# Altium PCB BBBExtend.PcbDoc
Units mil, origin at the board's own origin, x right, y up, seen from the top; angles counter-clockwise.
Board outline 3205 x 2770 mil, 2 copper layers (Top Layer, Bottom Layer); 5 components, 10 nets, 218 pads, 4 vias.
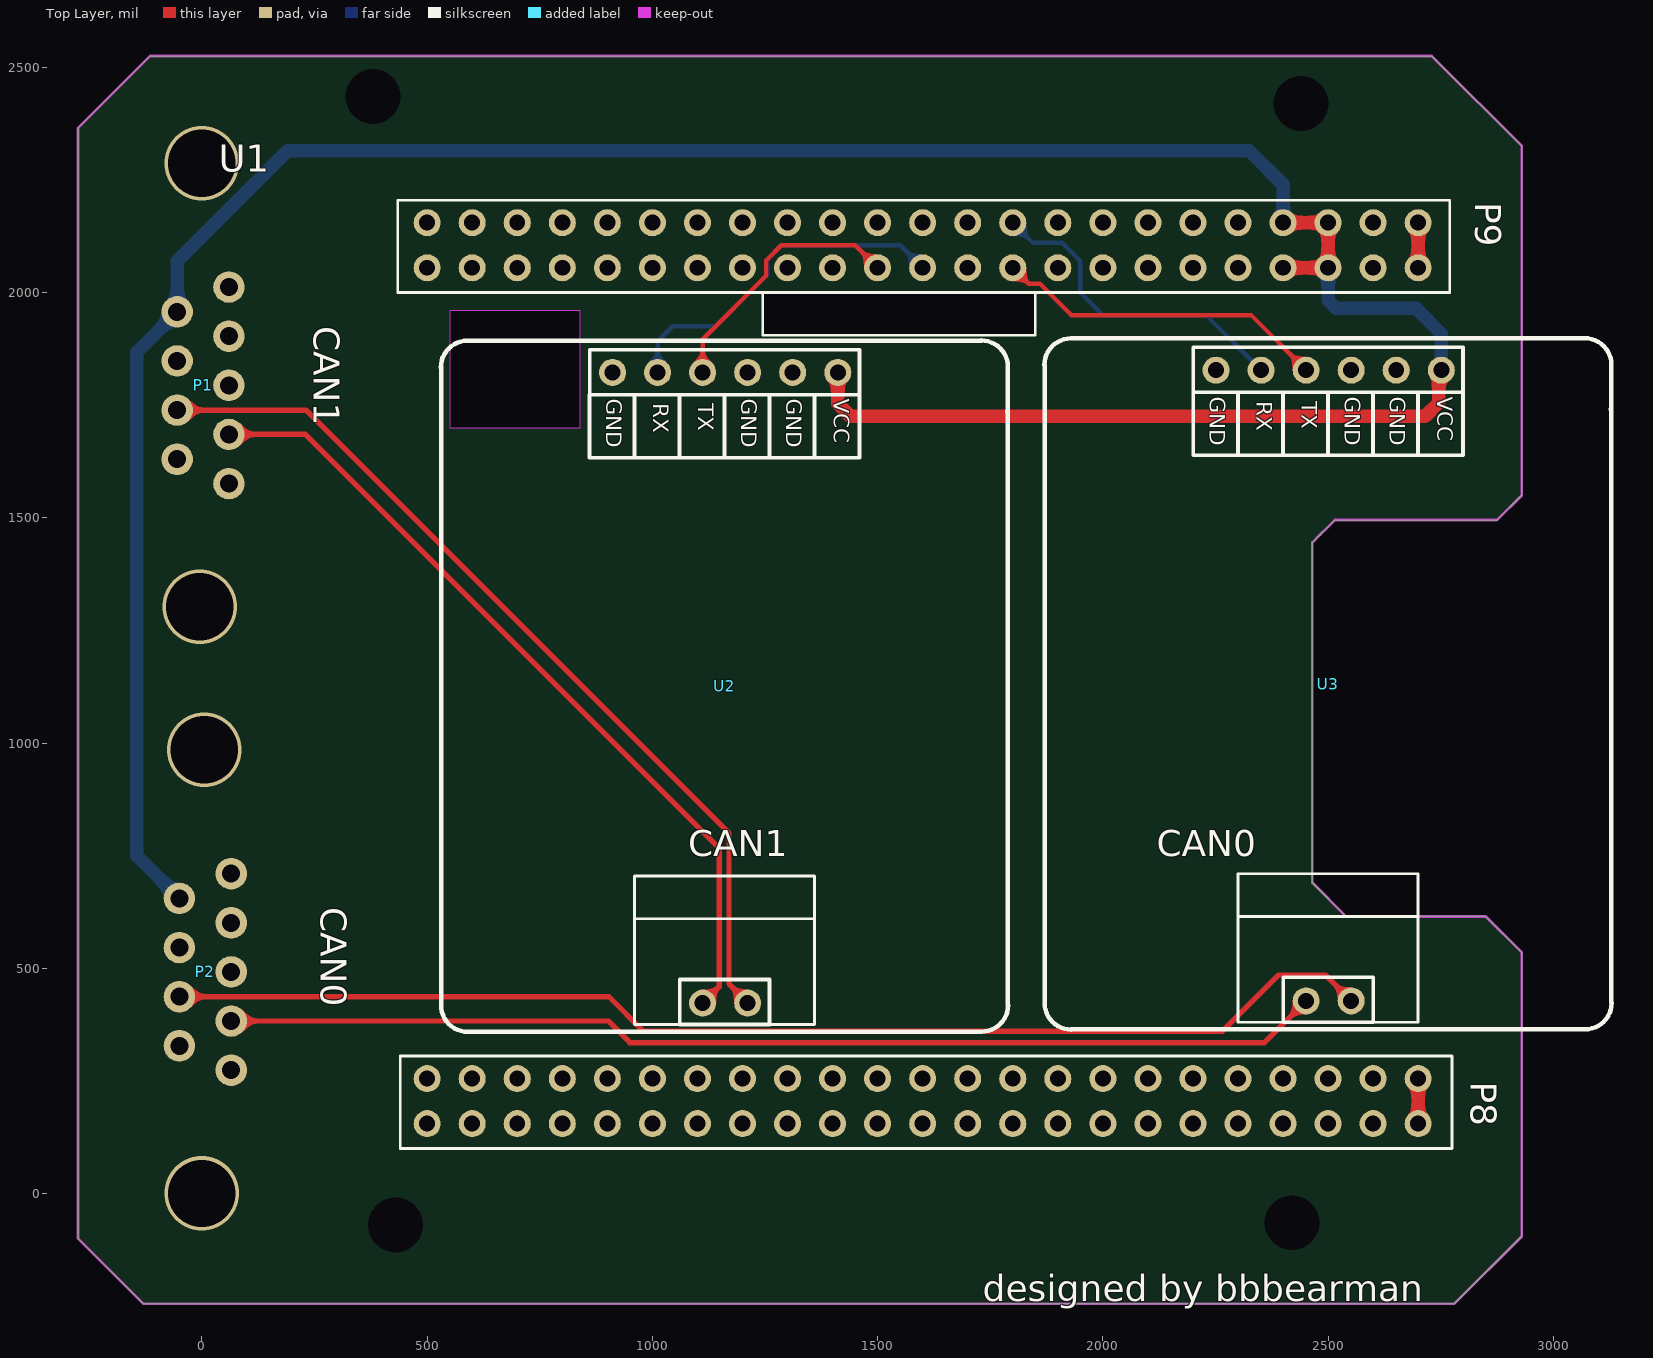
[diagram p0: Top Layer view]
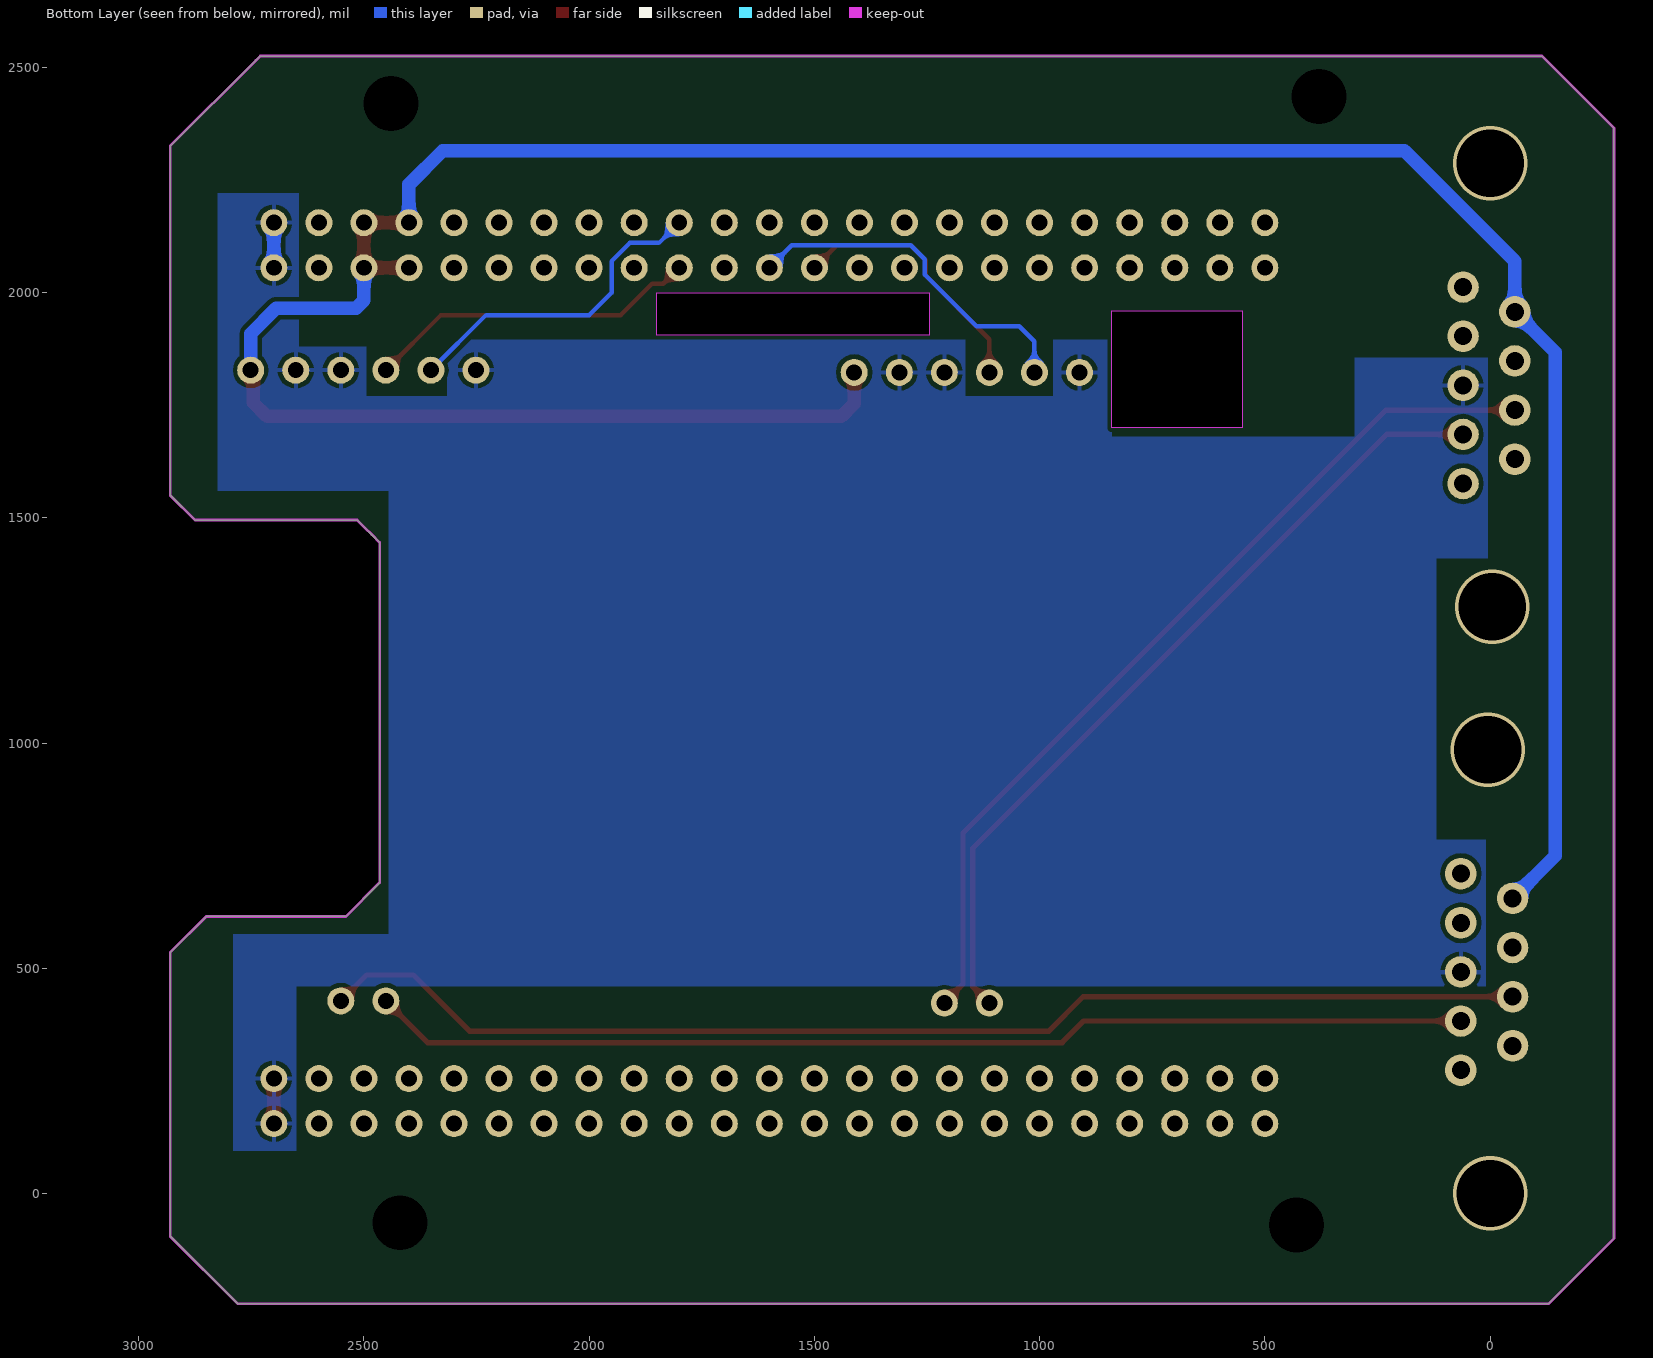
[diagram p1: Bottom Layer view, seen from below]
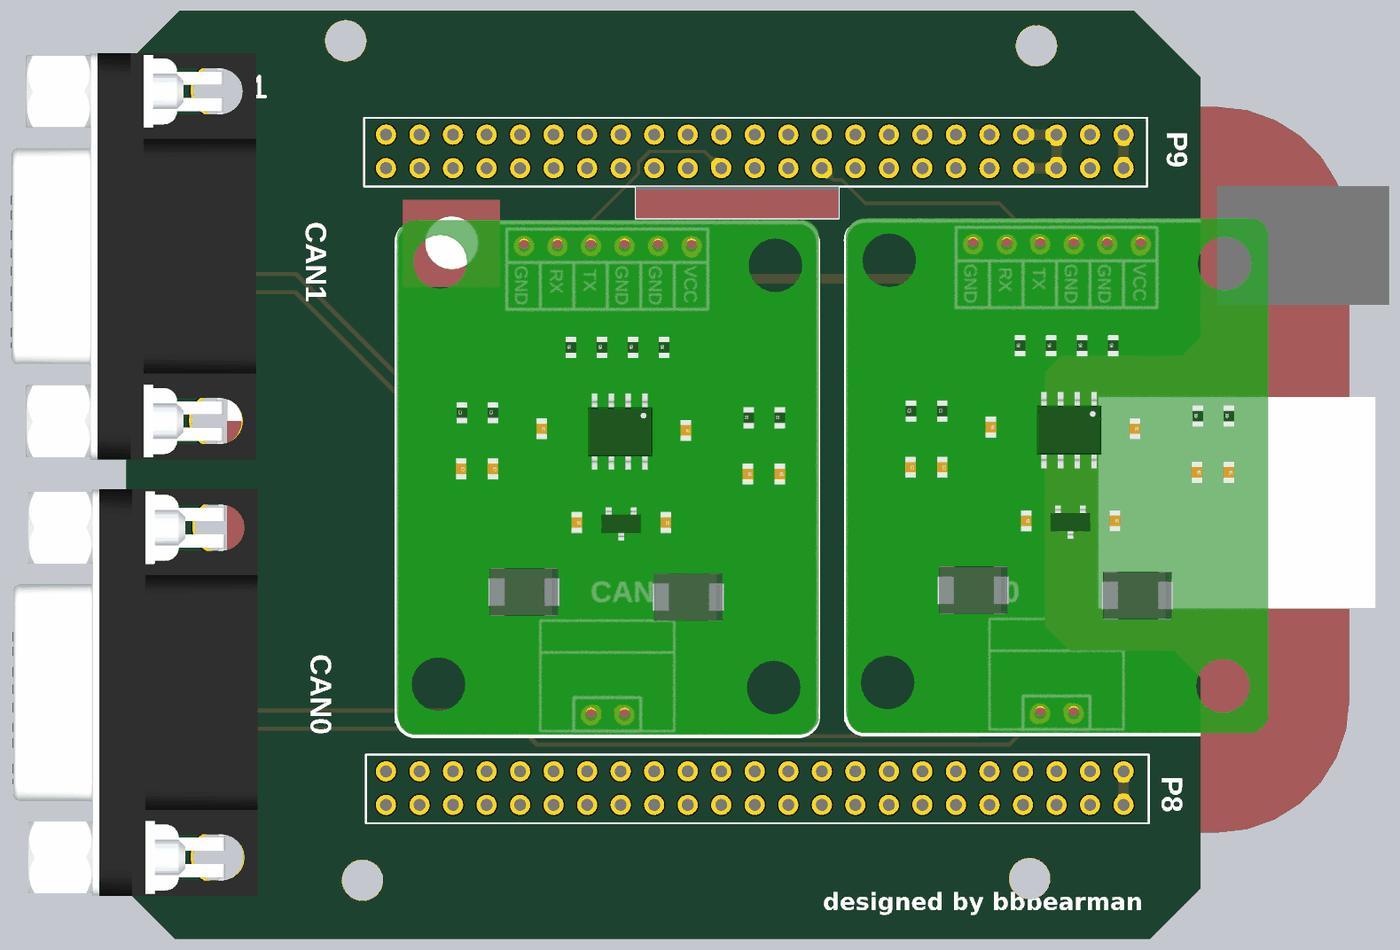
[diagram p2: 3D render of the assembled board from above, using the file's embedded part models]

## Layer stack, top to bottom
Top Solder: solder mask 0.4, Solder Resist, Dk 3.5
Top Layer: signal copper 1.4
Dielectric 1: dielectric 12.6, FR-4, Dk 4.8
Bottom Layer: signal copper 1.4
Bottom Solder: solder mask 0.4, Solder Resist, Dk 3.5

## Board outline
-275,-100 -130,-245 2780,-245 2930,-95 2930,535 2850,615 2540,615 2465,690 2465,1445 2482.5,1462.5 2497.5,1477.5 2515,1495 2875,1495 2930,1550 2930,2325 2740,2515 2730,2525 -115,2525 -275,2365
cut-out: 550,1700 840,1700 840,1960 550,1960
cut-out: 1245,1905 1850,1905 1850,2000 1245,2000

## Design rules (kind name [scope] priority, off if disabled: settings)
Clearance [All] p1: gap=10 ignorepadtopadclearanceinfootprint=FALSE except(0: Arc-Hole Track-Hole SMDPad-Hole THPad-Hole Via-Hole Fill-Hole Poly-Hole Region-Hole Text-Hole)
PolygonConnect [All] p1: connectstyle=Relief reliefconductorwidth=10 reliefentries=4 polygonreliefangle="90 Angle" airgapwidth=10
RoutingVias [All] p1: holewidth=28 width=50 viastyle="Through Hole" minholewidth=28 minwidth=50 maxholewidth=28 maxwidth=50
SolderMaskExpansion [All] p1: expansion=4 istentingtop=FALSE
Width [All] p1: maxlimit=100 minlimit=10 preferedwidth=10
30 further rules are at their usual default settings.

## Components (designator, comment, footprint, x,y, rotation, side; value= is the part's Value field where it differs from the comment)
P1 "DB9" DB9 60,2012.17 r270 top
P2 "DB9" DB9 65,710 r270 top
U1 "BeagleBone" BeagleBoneB 2700,255 r0 top
U2 "CAN" CANTRer 911.54,1822.58 r270 top
U3 "CAN" CANTRer 2251.3,1827.58 r270 top

## Footprints (in the part's own frame and the unit in brackets; to place one, negate y for a bottom-side part, rotate by r counter-clockwise, add the part's x,y. Pads: shape width x height; smd on the part's side, far side on the other; paste and mask are expansions set on the pad)
BeagleBoneB [mil]
  round 60 hole 35.43: 1(0,0) 2(0,-100) 3(-100,0) 4(-100,-100) 5(-200,0) 6(-200,-100) 7(-300,0) 8(-300,-100) 9(-400,0) 10(-400,-100) 11(-500,0) 12(-500,-100) 13(-600,0) 14(-600,-100) 15(-700,0) 16(-700,-100) 17(-800,0) 18(-800,-100) 19(-900,0) 20(-900,-100) 21(-1000,0) 22(-1000,-100) 23(-1100,0) 24(-1100,-100) 25(-1200,0) 26(-1200,-100) 27(-1300,0) 28(-1300,-100) 29(-1400,0) 30(-1400,-100) 31(-1500,0) 32(-1500,-100) 33(-1600,0) 34(-1600,-100) 35(-1700,0) 36(-1700,-100) 37(-1800,0) 38(-1800,-100) 39(-1900,0) 40(-1900,-100) 41(-2000,0) 42(-2000,-100) 43(-2100,0) 44(-2100,-100) 45(-2200,0) 46(-2200,-100) 101(0,1900) 102(0,1800) 103(-100,1900) 104(-100,1800) 105(-200,1900) 106(-200,1800) 107(-300,1900) 108(-300,1800) 109(-400,1900) 110(-400,1800) 111(-500,1900) 112(-500,1800) 113(-600,1900) 114(-600,1800) 115(-700,1900) 116(-700,1800) 117(-800,1900) 118(-800,1800) 119(-900,1900) 120(-900,1800) 121(-1000,1900) 122(-1000,1800) 123(-1100,1900) 124(-1100,1800) 125(-1200,1900) 126(-1200,1800) 127(-1300,1900) 128(-1300,1800) 129(-1400,1900) 130(-1400,1800) 131(-1500,1900) 132(-1500,1800) 133(-1600,1900) 134(-1600,1800) 135(-1700,1900) 136(-1700,1800) 137(-1800,1900) 138(-1800,1800) 139(-1900,1900) 140(-1900,1800) 141(-2000,1900) 142(-2000,1800) 143(-2100,1900) 144(-2100,1800) 145(-2200,1900) 146(-2200,1800)
  silkscreen extent -2265,-155 75,1950, body extent -2673,-183 791,1983, height 177
CANTRer [mil]
  round 9.99 on Top Overlay: 1(-70.43,819.26) 1(-70.43,834.24) 1(-70.43,-322.1) 1(-70.43,-322.1) 1(1404.2,877.76) 1(1404.2,878.3) 1(1404.75,-380.6) 1(1419.73,-380.6) 1(1463.19,818.77) 1(1463.19,819.26) 1(1463.19,-322.16) 1(1463.73,-321.61)
  round 7.86 on Top Overlay: 1(-50.77,548.22) 1(-50.77,548.22) 1(-50.77,-51.07) 1(-50.77,-51.07) 1(49.11,548.22) 1(49.11,548.22) 1(49.11,-51.07) 1(49.11,-51.07) 1(1347.58,148.7) 1(1347.58,148.7) 1(1347.58,348.46) 1(1347.58,348.46) 1(1447.46,148.7) 1(1447.46,148.7) 1(1447.46,348.46) 1(1447.46,348.46)
  round 60 hole 35.43: 1(0,500) 2(0,400) 3(0,300) 4(0,200) 5(0,100) 6(0,0) 7(1400,300) 8(1400,200)
  round 7.99 on Top Overlay: 1(49.11,548.22) 1(49.11,448.34) 1(49.11,348.46) 1(49.11,248.58) 1(49.11,148.7) 1(49.11,48.82) 1(49.11,-51.07) 1(188.95,548.22) 1(188.95,548.22) 1(188.95,448.34) 1(188.95,248.58) 1(188.95,348.46) 1(188.95,148.7) 1(188.95,-51.07) 1(188.95,-51.07) 1(188.95,48.82)
  silkscreen extent -73,-384 1464,880, body extent -78,-380 1457,880, height 376
DB9 [mil]
  round 70 hole 40: 1(436.22,0) 2(327.17,0) 3(218.11,0) 4(109.06,0) 5(0,0) 6(382.17,-115) 7(273.11,-115) 8(164.06,-115) 9(55,-115)
  body extent -386,-678 826,52, height 530

## Free pads (board coordinates)
  round 118.11 hole 122.05: HOLE(380,2435) HOLE(430,-70) HOLE(2420,-65) HOLE(2440,2420)

## Via types
v1: diameter 165.35, hole 149.61, Top Layer to Bottom Layer, 4 vias

## Nets (pads, with @x,y where several pads share a name; then routed paths per layer and width w, separated by ;. In a path a pad name is that pad's centre, name@x,y a point inside that pad or via, vN(x,y) a via of type N, cw(c..) or ccw(c..) an arc to the next point about the centre after c; other vN are vias at no path point)
+5: P1.9 P2.9 U1.105 U1.106 U1.107 U1.108 U2.1@1411.54,1822.58 U3.1@2751.3,1827.58 | length 6401.6
  Top Layer w30: U2.1@1411.54,1822.58 1411.54,1753.46 1440,1725 2715,1725 2745.56,1755.56 2745.56,1821.84 U3.1@2751.3,1827.58 ; U1.108 U1.106 U1.105 U1.107
  Bottom Layer w30: P2.9 -145,750 -145,1867.17 P1.9 -55,2070 190,2315 2325,2315 2400,2240 U1.107 ; U1.106 2500,1982.57 2517.57,1965 2695,1965 2751.3,1908.7 U3.1@2751.3,1827.58
CAN0H: P2.7 U3.7 | length 2708.7
  Top Layer w12: P2.7 903.11,436.89 980,360 2265,360 2390,485 2493.88,485 U3.7
CAN0L: P2.2 U3.8 | length 2444.5
  Top Layer w12: P2.2 902.17,382.83 950,335 2358.73,335 U3.8
CAN0RX: U1.119 U3.5 | length 727.9
  Bottom Layer w10: U1.119 1845,2110 1910,2110 1950,2070 1950,2000 2000,1950 2228.88,1950 U3.5
CAN0TX: U1.120 U3.4 | length 745.5
  Top Layer w10: U1.120 1835,2020 1860,2020 1930,1950 2328.88,1950 U3.4
CAN1H: P1.7 U2.7 | length 2008.6
  Top Layer w12: P1.7 230.94,1739.06 1170,800 1170,465 1211.54,423.46 U2.7
CAN1L: P1.2 U2.8 | length 1827.8
  Top Layer w12: P1.2 230,1685 1148,767 1148,459.04 U2.8
CAN1RX: U1.124 U2.5 | length 786.3
  Bottom Layer w10: U2.5 1011.54,1891.54 1045,1925 1140,1925 1255,2040 1255,2073.64 1286.36,2105 1550,2105 U1.124
CAN1TX: U1.126 U2.4 | length 589.2
  Top Layer w10: U2.4 1111.54,1896.54 1253.18,2038.18 1253.18,2071.82 1286.36,2105 1450,2105 U1.126
GND: P1.3 P2.3 U1.1 U1.2 U1.101 U1.102 U2.2 U2.3 U2.6 U3.2 U3.3 U3.6 | length 300
  Top Layer w30: U1.2 U1.1 ; U1.102 U1.101
  Bottom Layer w30: U1.102 U1.101
pads on no net: P1.1 P1.4 P1.5 P1.6 P1.8 P2.1 P2.4 P2.5 P2.6 P2.8 U1.3 U1.4 U1.5 U1.6 U1.7 U1.8 U1.9 U1.10 U1.11 U1.12 U1.13 U1.14 U1.15 U1.16 U1.17 U1.18 U1.19 U1.20 U1.21 U1.22 U1.23 U1.24 U1.25 U1.26 U1.27 U1.28 U1.29 U1.30 U1.31 U1.32 U1.33 U1.34 U1.35 U1.36 U1.37 U1.38 U1.39 U1.40 U1.41 U1.42 U1.43 U1.44 U1.45 U1.46 U1.103 U1.104 U1.109 U1.110 U1.111 U1.112 U1.113 U1.114 U1.115 U1.116 U1.117 U1.118 U1.121 U1.122 U1.123 U1.125 U1.127 U1.128 U1.129 U1.130 U1.131 U1.132 U1.133 U1.134 U1.135 U1.136 U1.137 U1.138 U1.139 U1.140 U1.141 U1.142 U1.143 U1.144 U1.145 U1.146 U2.1@530.94,402.85 U2.1@530.94,417.83 U2.1@589.38,359.39 U2.1@589.44,1893.01 U2.1@589.93,358.84 U2.1@860.47,1633.63 U2.1@860.47,1773.46 U2.1@860.47,1873.35 U2.1@960.35,1633.63 U2.1@960.35,1773.46 U2.1@1060.24,375.12 U2.1@1060.24,475 U2.1@1060.24,1633.63 U2.1@1060.24,1773.46 U2.1@1160.12,1633.63 U2.1@1160.12,1773.46 U2.1@1260,375.12 U2.1@1260,475 U2.1@1260,1633.63 U2.1@1260,1773.46 U2.1@1359.88,1633.63 U2.1@1359.88,1773.46 U2.1@1459.76,1633.63 U2.1@1459.76,1773.46 U2.1@1459.76,1873.35 U2.1@1730.8,359.39 U2.1@1730.8,1893.01 U2.1@1730.31,359.39 U2.1@1745.78,1893.01 U2.1@1789.3,418.37 U2.1@1789.84,418.37 U3.1@1870.7,407.85 U3.1@1870.7,422.83 U3.1@1929.2,1898.01 U3.1@1929.14,364.39 U3.1@1929.69,363.84 U3.1@2200.24,1638.63 U3.1@2200.24,1778.46 U3.1@2200.24,1878.35 U3.1@2300.12,1638.63 U3.1@2300.12,1778.46 U3.1@2400,380.12 U3.1@2400,480 U3.1@2400,1638.63 U3.1@2400,1778.46 U3.1@2499.88,1638.63 U3.1@2499.88,1778.46 U3.1@2599.76,380.12 U3.1@2599.76,480 U3.1@2599.76,1638.63 U3.1@2599.76,1778.46 U3.1@2699.65,1638.63 U3.1@2699.65,1778.46 U3.1@2799.53,1638.63 U3.1@2799.53,1778.46 U3.1@2799.53,1878.35 U3.1@3070.07,364.39 U3.1@3070.56,364.39 U3.1@3070.56,1898.01 U3.1@3085.54,1898.01 U3.1@3129.06,423.37 U3.1@3129.6,423.37
copper on no net:
  other v1: 0,0 5,985 -5,1302.17 0,2287.17

## Polygon pours and split planes (outlines as drawn)
GND on Bottom Layer "GND_L02_P000" (solid, pour order 0): 2645,2205 2645,1880 2495,1880 2495,1770 2315,1770 2315,1895 1165,1895 1165,1770 970,1770 970,1895 840,1895 840,1680 300,1680 300,1855 5,1855 5,1410 120,1410 120,785 10,785 10,460 2650,460 2650,95 2790,95 2790,575 2445,575 2445,1560 2825,1560 2825,2220 2645,2220

## Keep-outs
Keep-Out Layer:
  lines w6: -275,-100 -130,-245 2780,-245 2930,-95 2930,535 2850,615 2540,615 2465,690 2465,1445 2482.5,1462.5 2497.5,1477.5 2515,1495 2875,1495 2930,1550 2930,1565 2930,2325 2740,2515 2730,2525 -115,2525 -275,2365 -275,-100

## Silkscreen, mask and mechanical layers (free items; w line width, h text height)
Top Overlay:
  text "CAN1" at 228.41,1924.98 h100 r270
  text "CAN1" at 1080.02,728.41 h100
  text "CAN0" at 2120.02,728.41 h100
  text "CAN0" at 243.41,634.98 h100 r270
  text "designed by bbbearman" at 1733.53,-259.39 h100

## Text inside footprints (layer, text, board x,y; h text height)
U1: Top Overlay "P9" at 2806.88,2200.59 h100 r270; Top Overlay "P8" at 2797.22,248.38 h100 r270
U2: Top Overlay "GND" at 1185.22,1763.98 h59.93 r270; Top Overlay "VCC" at 1389.98,1763.98 h59.93 r270; Top Overlay "RX" at 989.82,1753.99 h59.93 r270; Top Overlay "TX" at 1089.7,1753.99 h59.93 r270; Top Overlay "GND" at 1285.11,1763.98 h59.93 r270; Top Overlay "GND" at 885.58,1763.98 h59.93 r270
U3: Top Overlay "GND" at 2524.99,1768.98 h59.93 r270; Top Overlay "VCC" at 2729.75,1768.98 h59.93 r270; Top Overlay "RX" at 2329.58,1758.99 h59.93 r270; Top Overlay "TX" at 2429.46,1758.99 h59.93 r270; Top Overlay "GND" at 2624.87,1768.98 h59.93 r270; Top Overlay "GND" at 2225.34,1768.98 h59.93 r270